# EAGLE board CNR_Temp_Sens_Eagle1 (EAGLE 7.5.0)
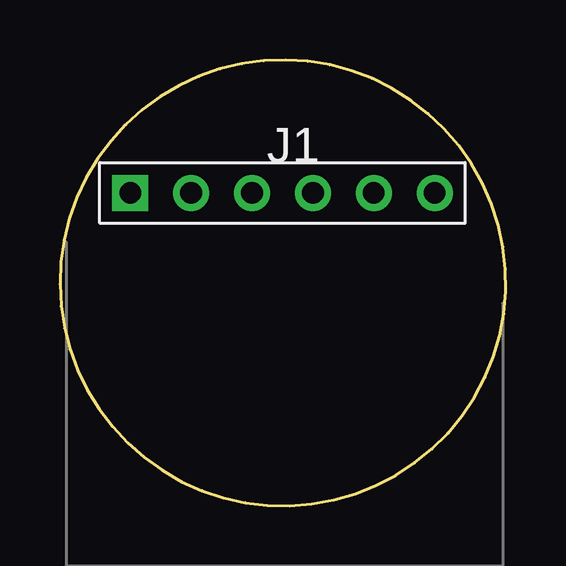
[diagram p0: board, top side]
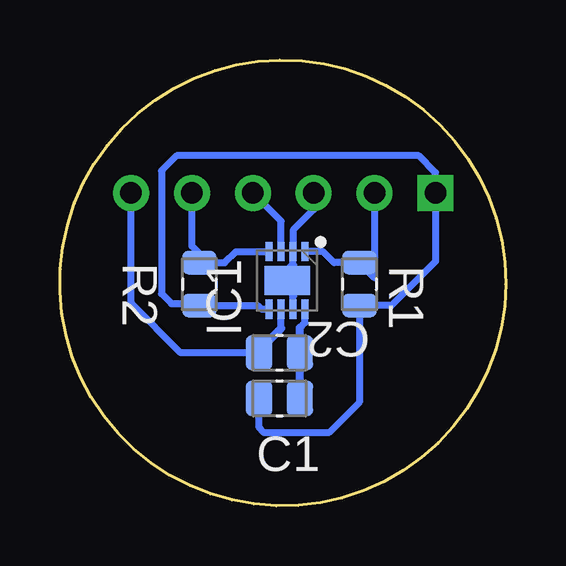
[diagram p1: board, bottom side, seen from below]

Size 18.59 x 18.6 mm. Coordinates in mm from the lower left corner, seen from the top.
Outline: 2.82,2.63 arc178 16.02,15.73 arc182 2.82,2.63
Copper layers (1*16): Top 0.035mm / dielectric 1.5mm / Bottom 0.035mm
Design rules "default *": minimum track width 10mil, minimum drill 0.61mm, track to track 8mil, track to pad 8mil, pad to pad 8mil, via to via 8mil, smd to smd 8mil, copper to edge 40mil, drill to drill 8mil, minimum pad ring 0mil, minimum via ring 8mil, stop-mask expansion 2mil, vias tented up to drill 19mil, thermal gap 10mil
Net classes: 0 Default: width 0.33 mm, clearance 0.33 mm

## Footprints (pad centres in the part's own frame; a part is rotated, then mirrored left to right if it is on the bottom)
CAP_0805_N = smd 1.11 x 1.47: 1 -0.85,0; 2 0.85,0
CAP_0805_N_C2 = smd 1.11 x 1.47: 1 -0.85,0; 2 0.85,0
SON50P250X250X100-9N-D = smd 0.8 x 0.3: 1 -1.2,0.75; 2 -1.2,0.25; 3 -1.2,-0.25; 4 -1.2,-0.75; 5 1.2,-0.75; 6 1.2,-0.25; 7 1.2,0.25; 8 1.2,0.75 | smd 1.2 x 1.9: 9 0,0
HDR-1x6 = drill 0.9 pad 1.5 square: 1 -6.35,0 | drill 0.9 pad 1.5: 2 -3.81,0; 3 -1.27,0; 4 1.27,0; 5 3.81,0; 6 6.35,0
RES_0805_N = smd 0.98 x 1.42: 1 -0.895,0; 2 0.895,0
RES_0805_N_R2 = smd 0.98 x 1.42: 1 -0.895,0; 2 0.895,0

## Placement (x,y rotation side)
C1  100nF  [CAP_0805_N]  9.44,4.48 0 bottom
C2  100nF  [CAP_0805_N_C2]  9.44,6.39 180 bottom
IC1  SHT35-DIS-B  [SON50P250X250X100-9N-D]  9.12,9.4 270 bottom
J1  HDR-1X6  [HDR-1x6]  9.28,13.05 0 top
R1  15k  [RES_0805_N]  6.11,9.24 270 bottom
R2  15k  [RES_0805_N_R2]  12.77,9.24 270 bottom

## Library data of the parts
C1 C2 = common; UNIQUE_NAME: CAP_0805_INCH
IC1 = common; DATASHEET: https://componentsearchengine.com/Datasheets/1/SHT35-DIS-B.pdf; DESCRIPTION: RH&T Sensor +/-1.5%RH +/-0.2C DFN8 Sensirion SHT35-DIS-B Temperature & Humidity Sensor, -40 +125 C, 8-Pin DFN; HEIGHT: 1 mm; MANUFACTURER: Sensirion; MANUFACTURER_NAME: Sensirion; MANUFACTURER_PART_NUMBER: SHT35-DIS-B; MOUSER_PART_NUMBER: 403-SHT35-DIS-B; MOUSER_PRICE/STOCK: https://www.mouser.com/Search/Refine.aspx?Keyword=403-SHT35-DIS-B
J1 = common; UNIQUE_NAME: HDR-1x6
R1 R2 = common; UNIQUE_NAME: RES_0805_INCH

## Nets
ALERT: IC1.3 J1.4
GND: C1.2 C2.1 IC1.2 IC1.7 IC1.8 IC1.9 J1.3
RESET: C2.2 IC1.6 J1.6
SCL: IC1.4 J1.5 R2.1
SDA: IC1.1 J1.2 R1.1
VCC: C1.1 IC1.5 J1.1 R1.2 R2.2

## Tracks (layer width: path | path; a pad name or v marks a point on that pad's centre or on a via)
ALERT
  Bottom 0.3: IC1.3 9.37,11.87 J1.4
GND
  Bottom 0.3: IC1.7 8.87,8.77 | 8.87,10.04 IC1.2 8.87,11.17 8.87,11.49 8.01,12.35 J1.3 | 8.59,7.42 8.37,7.64 IC1.8
  Bottom 0.33: C1.2 C2.1 8.59,7.42 | 8.87,8.77 8.87,9.15 IC1.9 9.12,9.79 8.87,10.04
RESET
  Bottom 0.3: 9.37,7.41 IC1.6 | C2.2 13.55,6.39 15.63,8.46 J1.6
  Bottom 0.33: C2.2 10.29,6.49 9.37,7.41
SCL
  Bottom 0.3: IC1.4 11.26,10.6 11.72,10.14 R2.1 12.77,10.51 13.09,10.83 J1.5
SDA
  Bottom 0.3: J1.2 5.47,9.5 R1.1 7.16,10.14 7.62,10.6 IC1.1
VCC
  Bottom 0.3: IC1.5 10.19,8.2 10.33,8.35 R2.2 13.19,8.35 13.28,8.44 13.95,8.44 14.36,8.85 14.36,13.98 13.74,14.6 3.63,14.6 2.93,13.9 J1.1 2.93,10.2 4.78,8.35 R1.2 6.11,4.32 7.38,3.05 10.07,3.05 10.29,3.27 C1.1

## Text on the board
tPlace: J1
bPlace: R1 | IC1 | R2 | C2 | C1